# Altium PCB PCB2.PcbDoc
Units mm, origin at the board's own origin, x right, y up, seen from the top; angles counter-clockwise.
Board outline 67.7 x 82.8 mm, 2 copper layers (Top Layer, Bottom Layer); 31 components, 50 nets, 184 pads, 19 vias.
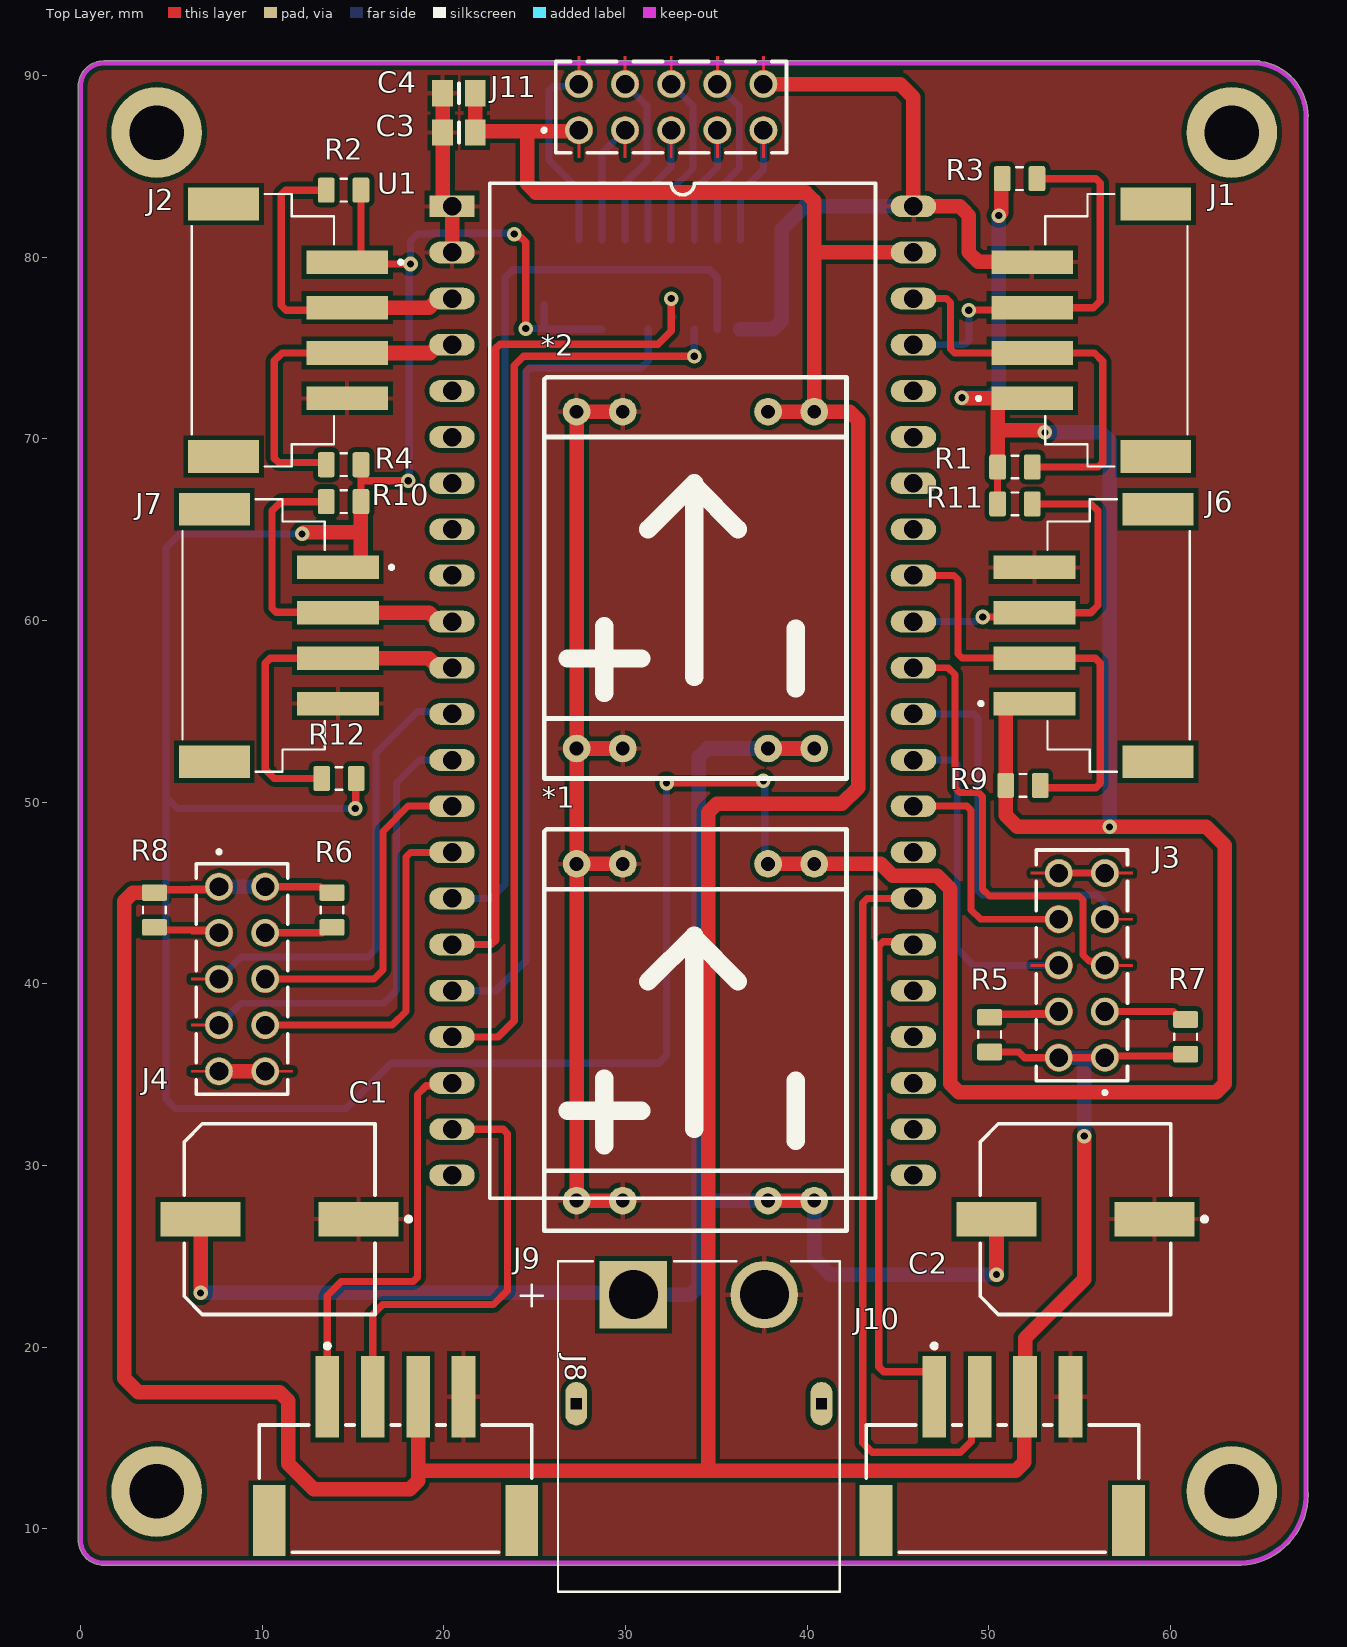
[diagram p0: Top Layer view]
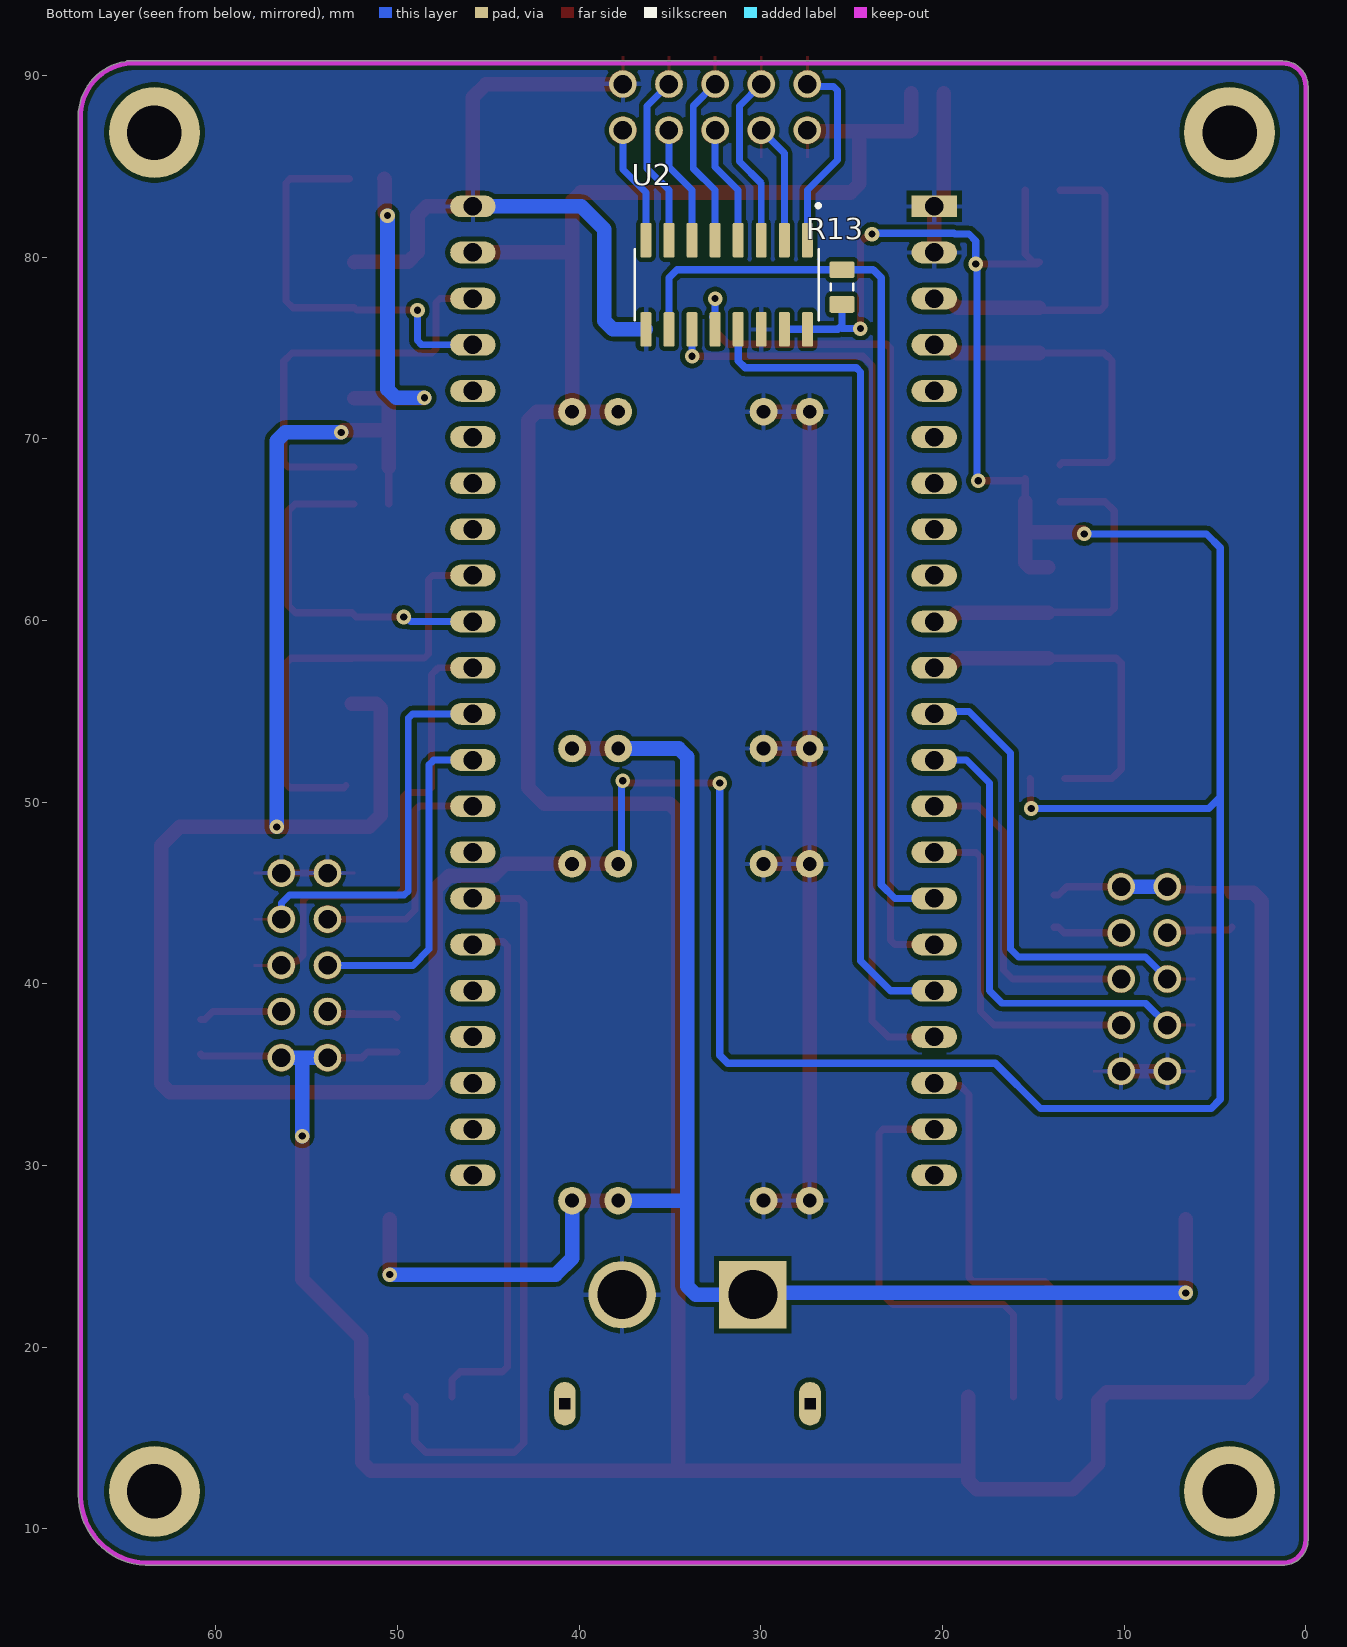
[diagram p1: Bottom Layer view, seen from below]
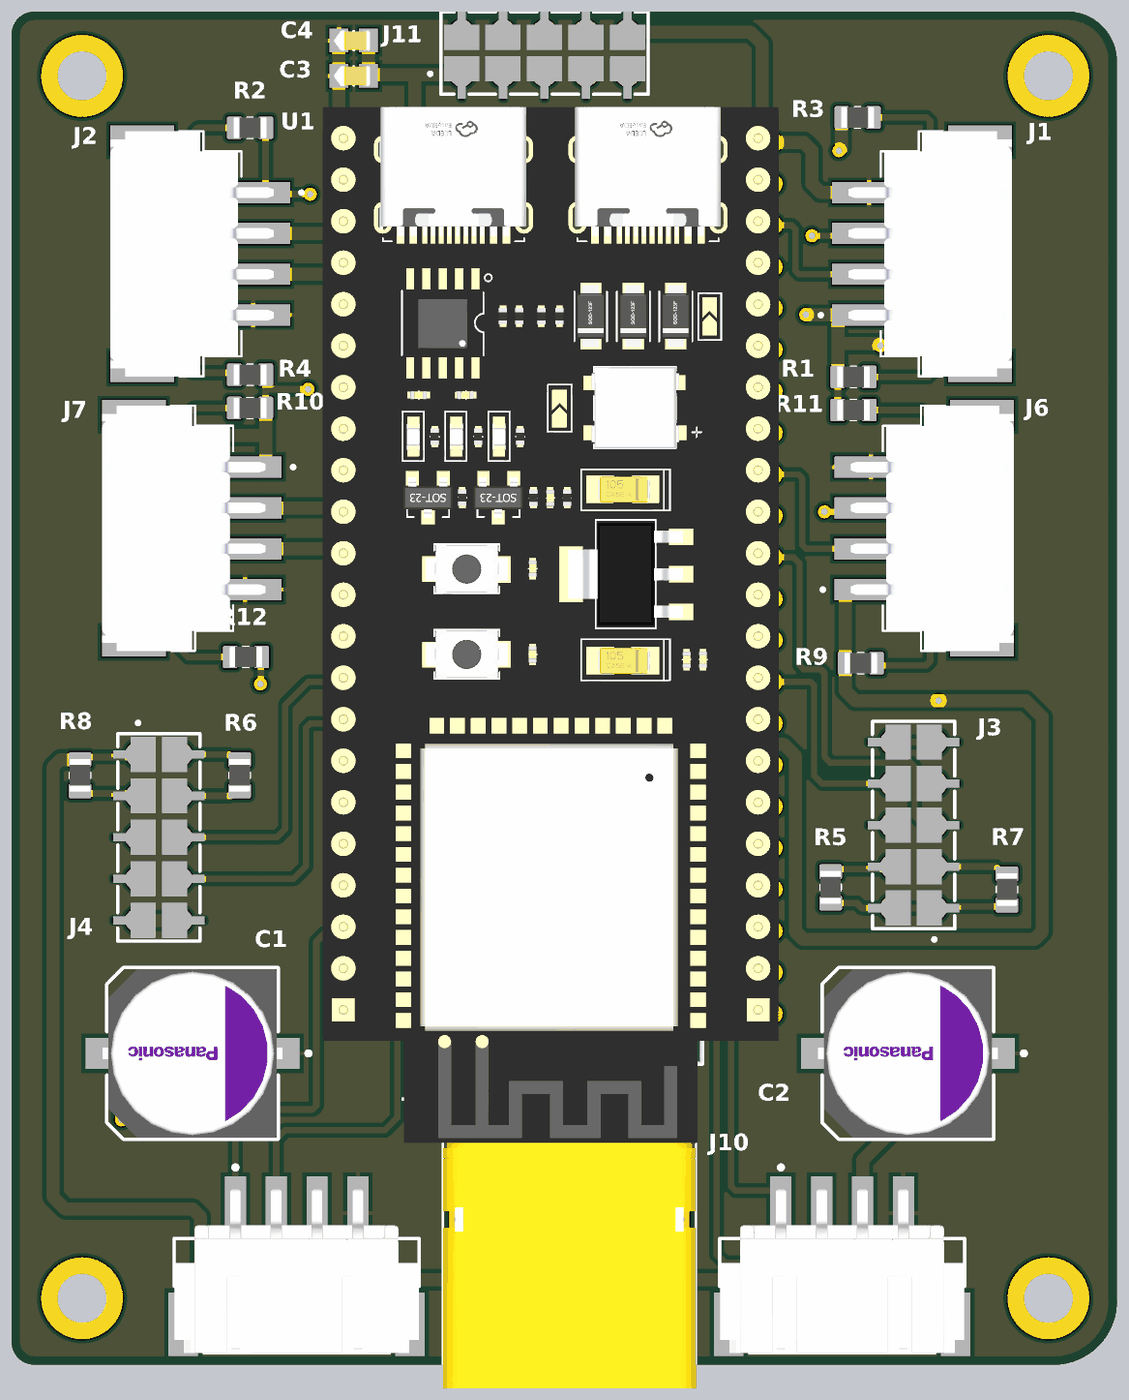
[diagram p2: 3D render of the assembled board from above, using the file's embedded part models]

## Layer stack, top to bottom
Top Solder: solder mask 0.0102, Solder Resist, Dk 3.5
Top Layer: signal copper 0.0356
Dielectric 1: dielectric 0.32, FR-4, Dk 4.8
Bottom Layer: signal copper 0.0356
Bottom Solder: solder mask 0.0102, Solder Resist, Dk 3.5

## Board outline
-0.127,9.398 ccw(c1.27,9.398) 1.269,8.001 1.27,8.001 63.881,8.001 63.887,8.001 ccw(c63.691,11.875) 67.569,11.875 ccw(c63.691,11.875) 67.564,12.069 67.564,87.627 ccw(c64.516,87.757) 67.567,87.757 ccw(c64.516,87.757) 64.983,90.772 64.897,90.805 1.27,90.805 ccw(c1.27,89.408) -0.127,89.408 -0.127,12.573

## Design rules (kind name [scope] priority, off if disabled: settings)
Clearance [All] p1: gap=0.254 ignorepadtopadclearanceinfootprint=FALSE
PolygonConnect [All] p1: connectstyle=Relief reliefconductorwidth=0.254 reliefentries=4 polygonreliefangle="90 Angle" airgapwidth=0.254
RoutingVias [All] p1: holewidth=0.4 width=0.8 viastyle="Through Hole" minholewidth=0.4 minwidth=0.8 maxholewidth=0.4 maxwidth=0.8
SolderMaskExpansion [All] p1: expansion=0.102 istentingtop=FALSE
Width [All] p1: maxlimit=0.8 minlimit=0.2 preferedwidth=0.4
30 further rules are at their usual default settings.

## Components (designator, comment, footprint, x,y, rotation, side; value= is the part's Value field where it differs from the comment)
*1 "MD?" MP1584 40.386,28.069 r90 top
*2 "MD?" MP1584 40.386,52.959 r90 top
C1 "100SXV15MX" FP-OS-CON-SMT-F8-MFG 10.954,27.051 r180 top
C2 "100SXV15MX" FP-OS-CON-SMT-F8-MFG 54.769,27.051 r180 top
C3 "F951C106MPAAQ2" CAPC2012X140N 20.828,86.868 r180 top
C4 "F951C106MPAAQ2" CAPC2012X140N 20.828,89.027 r180 top
J1 "S4B-XH-SM4-TB" JST_S4B-XH-SM4-TB 59.182,75.981 r90 top
J2 "S4B-XH-SM4-TB" JST_S4B-XH-SM4-TB 7.874,75.981 r270 top
J3 "MTLW-105-05-TM-D-150" SAMTEC_MTLW-105-05-TM-D-150 55.118,41.021 r90 top
J4 "MTLW-105-05-TM-D-150" SAMTEC_MTLW-105-05-TM-D-150 8.89,40.271 r270 top
J6 "S4B-XH-SM4-TB" JST_S4B-XH-SM4-TB 59.309,59.182 r90 top
J7 "S4B-XH-SM4-TB" JST_S4B-XH-SM4-TB 7.366,59.182 r270 top
J8 "S4B-XH-SM4-TB(LF)(SN)" FP-S4B-XH-SM4-TB_LF_SN-MFG 17.332,12.222 r0 top
J9 "XT60PW-M" AMASS_XT60PW-M 34.036,16.891 r0 top
J10 "S4B-XH-SM4-TB(LF)(SN)" FP-S4B-XH-SM4-TB_LF_SN-MFG 50.74,12.222 r0 top
J11 "MTLW-105-05-TM-D-150" SAMTEC_MTLW-105-05-TM-D-150 32.512,88.265 r0 top
R1 "RC0805FR-1010KL" RESC2012X60N 51.435,68.453 r180 top
R2 "RC0805FR-1010KL" RESC2012X60N 14.478,83.693 r0 top
R3 "RC0805FR-1010KL" RESC2012X60N 51.689,84.328 r0 top
R4 "RC0805FR-1010KL" RESC2012X60N 14.478,68.58 r180 top
R5 "RC0805FR-1010KL" RESC2012X60N 50.038,37.211 r270 top
R6 "RC0805FR-1010KL" RESC2012X60N 13.843,44.069 r90 top
R7 "RC0805FR-1010KL" RESC2012X60N 60.833,37.084 r270 top
R8 "RC0805FR-1010KL" RESC2012X60N 4.064,44.069 r90 top
R9 "RC0805FR-1010KL" RESC2012X60N 51.877,50.927 r180 top
R10 "RC0805FR-1010KL" RESC2012X60N 14.478,66.548 r0 top
R11 "RC0805FR-1010KL" RESC2012X60N 51.435,66.421 r0 top
R12 "RC0805FR-1010KL" RESC2012X60N 14.224,51.308 r180 top
R13 "RC0805FR-1010KL" RESC2012X60N 25.527,78.359 r270 bottom
U1 "ESP32-S3-N16R8" DIP44 20.447,82.804 r0 top
U2 "MCP3008-I/SL" SOIC127P600X175-16N 31.877,78.486 r270 bottom

## Footprints (in the part's own frame and the unit in brackets; to place one, negate y for a bottom-side part, rotate by r counter-clockwise, add the part's x,y. Pads: shape width x height; smd on the part's side, far side on the other; paste and mask are expansions set on the pad)
AMASS_XT60PW-M [mm]
  rect 3.716x3.716 / inner round 3.716 / far side rect 3.716x3.716 hole 2.7 mask+0.102: 1(-3.6,6)
  round 3.716 hole 2.7 mask+0.102: 2(3.6,6)
  oval 1.2x2.4 hole 0.6 square mask+0.102: SH1(-6.75,0) SH2(6.75,0)
  silkscreen extent -9.8,-10.35 7.75,7.85, body extent -7.75,-10.35 7.75,7.85, height 8.4
CAPC2012X140N [mm]
  rect 1.15x1.45 smd: 1(-0.9,0) 2(0.9,0)
  silkscreen extent 0,-0.55 0,0.55, body extent -1,-0.63 1.2,0.63, height 0.6
DIP44 [mm]
  rect 2.5x1.2 hole 1.02: 1(0,0)
  oval 2.5x1.2 hole 1.02: 2(0,-2.54) 3(0,-5.08) 4(0,-7.62) 5(0,-10.16) 6(0,-12.7) 7(0,-15.24) 8(0,-17.78) 9(0,-20.32) 10(0,-22.86) 11(0,-25.4) 12(0,-27.94) 13(0,-30.48) 14(0,-33.02) 15(0,-35.56) 16(0,-38.1) 17(0,-40.64) 18(0,-43.18) 19(0,-45.72) 20(0,-48.26) 21(0,-50.8) 22(0,-53.34) 23(25.4,0) 24(25.4,-2.54) 25(25.4,-5.08) 26(25.4,-7.62) 27(25.4,-10.16) 28(25.4,-12.7) 29(25.4,-15.24) 30(25.4,-17.78) 31(25.4,-20.32) 32(25.4,-22.86) 33(25.4,-25.4) 34(25.4,-27.94) 35(25.4,-30.48) 36(25.4,-33.02) 37(25.4,-35.56) 38(25.4,-38.1) 39(25.4,-40.64) 40(25.4,-43.18) 41(25.4,-45.72) 42(25.4,-48.26) 43(25.4,-50.8) 44(25.4,-53.34)
  silkscreen extent 2.08,-54.61 23.32,1.27, body extent -1.52,-61.23 26.42,2.16, height 11.25
FP-OS-CON-SMT-F8-MFG [mm]
  rect 4.4x1.9 smd paste+0 mask+0: 1(-4.35,0) 2(4.35,0)
  silkscreen extent -7.23,-5.25 5.25,5.25, body extent -6.8,-5.5 6.8,5.5, height 0.25
FP-S4B-XH-SM4-TB_LF_SN-MFG [mm]
  rect 1.3x4.5 smd paste+0 mask+0: 1(-3.75,5.05) 2(-1.25,5.05) 3(1.25,5.05) 4(3.75,5.05)
  rect 1.8x3.9 smd paste+0 mask+0: 5(-6.95,-1.75) 6(6.95,-1.75)
  silkscreen extent -7.5,-3.5 7.5,7.97, body extent -7.95,-3.8 7.95,7.4, height 0.25
JST_S4B-XH-SM4-TB [mm]
  rect 1.3x4.5 smd: 1(-3.75,6.8) 2(-1.25,6.8) 3(1.25,6.8) 4(3.75,6.8)
  rect 1.8x3.9 smd: SH1(-6.95,0) SH2(6.95,0)
  silkscreen extent -7.5,-1.75 7.5,9.85, body extent -7.5,-1.95 7.5,8.05, height 6.12
MP1584 [mil]
  round 60 hole 30: 1(0,100) 1(0,0) 2(0,514.96) 2(0,414.96) 3(729.92,414.96) 3(729.92,514.96) 4(729.92,0) 4(729.92,100)
  silkscreen extent -65,-70 805,585, body extent -65,-71 805,591, height 161
RESC2012X60N [mm]
  rrect25% 0.92x1.38 smd: 1(-0.955,0) 2(0.955,0)
  silkscreen extent -0.18,-0.62 0.18,0.62, body extent -1,-0.63 1,0.63, height 0.6
SAMTEC_MTLW-105-05-TM-D-150 [mm]
  round 1.52 hole 1.02: 01(-5.08,-1.27) 02(-5.08,1.27) 03(-2.54,-1.27) 04(-2.54,1.27) 05(0,-1.27) 06(0,1.27) 07(2.54,-1.27) 08(2.54,1.27) 09(5.08,-1.27) 10(5.08,1.27)
  Top Layer region: 5.145,2.03 5.174,2.027 5.208,2.022 5.243,2.016 5.277,2.008 5.31,1.998 5.343,1.987 5.376,1.975 5.408,1.961 5.439,1.945 5.47,1.928 5.5,1.91 5.529,1.89 5.556,1.869 5.583,1.847 5.609,1.823 5.634,1.799 5.658,1.773 5.68,1.746 5.701,1.718 5.721,1.69 5.74,1.66 5.757,1.63 5.773,1.598 5.787,1.566 5.8,1.534 5.811,1.501 5.821,1.467 5.829,1.433 5.836,1.399 5.84,1.37 5.84,1.27 5.839,1.23 5.836,1.191 5.831,1.151 5.823,1.112 5.814,1.073 5.803,1.035 5.79,0.998 5.774,0.961 5.757,0.925 5.738,0.89 5.717,0.856 5.695,0.823 5.671,0.792 5.645,0.761 5.617,0.733 5.589,0.705 5.558,0.679 5.527,0.655 5.494,0.633 5.46,0.612 5.425,0.593 5.389,0.576 5.352,0.56 5.315,0.547 5.277,0.536 5.238,0.527 5.199,0.519 5.159,0.514 5.12,0.511 5.08,0.51 5.04,0.511 5.001,0.514 4.961,0.519 4.922,0.527 4.883,0.536 4.845,0.547 4.808,0.56 4.771,0.576 4.735,0.593 4.7,0.612 4.666,0.633 4.633,0.655 4.602,0.679 4.571,0.705 4.543,0.733 4.515,0.761 4.489,0.792 4.465,0.823 4.443,0.856 4.422,0.89 4.403,0.925 4.386,0.961 4.37,0.998 4.357,1.035 4.346,1.073 4.337,1.112 4.329,1.151 4.324,1.191 4.321,1.23 4.32,1.27 4.32,1.37 4.324,1.399 4.331,1.433 4.339,1.467 4.349,1.501 4.36,1.534 4.373,1.566 4.387,1.598 4.403,1.63 4.42,1.66 4.439,1.69 4.459,1.718 4.48,1.746 4.502,1.773 4.526,1.799 4.551,1.823 4.577,1.847 4.604,1.869 4.631,1.89 4.66,1.91 4.69,1.928 4.721,1.945 4.752,1.961 4.784,1.975 4.817,1.987 4.85,1.998 4.883,2.008 4.917,2.016 4.952,2.022 4.986,2.027 5.015,2.03 5.015,2.8 5.145,2.8
  Top Layer region: 5.159,-0.514 5.238,-0.527 5.315,-0.547 5.389,-0.576 5.46,-0.612 5.527,-0.655 5.589,-0.705 5.645,-0.761 5.695,-0.823 5.738,-0.89 5.774,-0.961 5.803,-1.035 5.823,-1.112 5.836,-1.191 5.84,-1.27 5.839,-1.308 5.836,-1.346 5.832,-1.383 5.825,-1.421 5.817,-1.457 5.807,-1.494 5.795,-1.529 5.781,-1.564 5.766,-1.599 5.749,-1.633 5.73,-1.665 5.71,-1.697 5.688,-1.728 5.665,-1.757 5.64,-1.786 5.614,-1.813 5.586,-1.839 5.557,-1.863 5.528,-1.886 5.497,-1.908 5.465,-1.928 5.432,-1.946 5.398,-1.962 5.363,-1.977 5.328,-1.991 5.292,-2.002 5.256,-2.012 5.219,-2.02 5.182,-2.026 5.145,-2.03 5.145,-2.8 5.015,-2.8 5.015,-2.03 4.978,-2.026 4.941,-2.02 4.904,-2.012 4.868,-2.002 4.832,-1.991 4.797,-1.977 4.762,-1.962 4.728,-1.946 4.695,-1.928 4.663,-1.908 4.632,-1.886 4.603,-1.863 4.574,-1.839 4.546,-1.813 4.52,-1.786 4.495,-1.757 4.472,-1.728 4.45,-1.697 4.43,-1.665 4.411,-1.633 4.394,-1.599 4.379,-1.564 4.365,-1.529 4.353,-1.494 4.343,-1.457 4.335,-1.421 4.328,-1.383 4.324,-1.346 4.321,-1.308 4.32,-1.27 4.324,-1.191 4.337,-1.112 4.357,-1.035 4.386,-0.961 4.422,-0.89 4.465,-0.823 4.515,-0.761 4.571,-0.705 4.633,-0.655 4.7,-0.612 4.771,-0.576 4.845,-0.547 4.922,-0.527 5.001,-0.514 5.08,-0.51
  Top Layer region: 2.605,2.03 2.634,2.027 2.668,2.022 2.703,2.016 2.737,2.008 2.77,1.998 2.803,1.987 2.836,1.975 2.868,1.961 2.899,1.945 2.93,1.928 2.96,1.91 2.989,1.89 3.016,1.869 3.043,1.847 3.069,1.823 3.094,1.799 3.118,1.773 3.14,1.746 3.161,1.718 3.181,1.69 3.2,1.66 3.217,1.63 3.233,1.598 3.247,1.566 3.26,1.534 3.271,1.501 3.281,1.467 3.289,1.433 3.296,1.399 3.3,1.37 3.3,1.27 3.299,1.23 3.296,1.191 3.291,1.151 3.283,1.112 3.274,1.073 3.263,1.035 3.25,0.998 3.234,0.961 3.217,0.925 3.198,0.89 3.177,0.856 3.155,0.823 3.131,0.792 3.105,0.761 3.077,0.733 3.049,0.705 3.018,0.679 2.987,0.655 2.954,0.633 2.92,0.612 2.885,0.593 2.849,0.576 2.812,0.56 2.775,0.547 2.737,0.536 2.698,0.527 2.659,0.519 2.619,0.514 2.58,0.511 2.54,0.51 2.5,0.511 2.461,0.514 2.421,0.519 2.382,0.527 2.343,0.536 2.305,0.547 2.268,0.56 2.231,0.576 2.195,0.593 2.16,0.612 2.126,0.633 2.093,0.655 2.062,0.679 2.031,0.705 2.003,0.733 1.975,0.761 1.949,0.792 1.925,0.823 1.903,0.856 1.882,0.89 1.863,0.925 1.846,0.961 1.83,0.998 1.817,1.035 1.806,1.073 1.797,1.112 1.789,1.151 1.784,1.191 1.781,1.23 1.78,1.27 1.78,1.37 1.784,1.399 1.791,1.433 1.799,1.467 1.809,1.501 1.82,1.534 1.833,1.566 1.847,1.598 1.863,1.63 1.88,1.66 1.899,1.69 1.919,1.718 1.94,1.746 1.962,1.773 1.986,1.799 2.011,1.823 2.037,1.847 2.064,1.869 2.091,1.89 2.12,1.91 2.15,1.928 2.181,1.945 2.212,1.961 2.244,1.975 2.277,1.987 2.31,1.998 2.343,2.008 2.377,2.016 2.412,2.022 2.446,2.027 2.475,2.03 2.475,2.8 2.605,2.8
  Top Layer region: 2.619,-0.514 2.698,-0.527 2.775,-0.547 2.849,-0.576 2.92,-0.612 2.987,-0.655 3.049,-0.705 3.105,-0.761 3.155,-0.823 3.198,-0.89 3.234,-0.961 3.263,-1.035 3.283,-1.112 3.296,-1.191 3.3,-1.27 3.299,-1.308 3.296,-1.346 3.292,-1.383 3.285,-1.421 3.277,-1.457 3.267,-1.494 3.255,-1.529 3.241,-1.564 3.226,-1.599 3.209,-1.633 3.19,-1.665 3.17,-1.697 3.148,-1.728 3.125,-1.757 3.1,-1.786 3.074,-1.813 3.046,-1.839 3.017,-1.863 2.988,-1.886 2.957,-1.908 2.925,-1.928 2.892,-1.946 2.858,-1.962 2.823,-1.977 2.788,-1.991 2.752,-2.002 2.716,-2.012 2.679,-2.02 2.642,-2.026 2.605,-2.03 2.605,-2.8 2.475,-2.8 2.475,-2.03 2.438,-2.026 2.401,-2.02 2.364,-2.012 2.328,-2.002 2.292,-1.991 2.257,-1.977 2.222,-1.962 2.188,-1.946 2.155,-1.928 2.123,-1.908 2.092,-1.886 2.063,-1.863 2.034,-1.839 2.006,-1.813 1.98,-1.786 1.955,-1.757 1.932,-1.728 1.91,-1.697 1.89,-1.665 1.871,-1.633 1.854,-1.599 1.839,-1.564 1.825,-1.529 1.813,-1.494 1.803,-1.457 1.795,-1.421 1.788,-1.383 1.784,-1.346 1.781,-1.308 1.78,-1.27 1.784,-1.191 1.797,-1.112 1.817,-1.035 1.846,-0.961 1.882,-0.89 1.925,-0.823 1.975,-0.761 2.031,-0.705 2.093,-0.655 2.16,-0.612 2.231,-0.576 2.305,-0.547 2.382,-0.527 2.461,-0.514 2.54,-0.51
  Top Layer region: 0.065,2.03 0.094,2.027 0.128,2.022 0.163,2.016 0.197,2.008 0.23,1.998 0.263,1.987 0.296,1.975 0.328,1.961 0.359,1.945 0.39,1.928 0.42,1.91 0.449,1.89 0.476,1.869 0.503,1.847 0.529,1.823 0.554,1.799 0.578,1.773 0.6,1.746 0.621,1.718 0.641,1.69 0.66,1.66 0.677,1.63 0.693,1.598 0.707,1.566 0.72,1.534 0.731,1.501 0.741,1.467 0.749,1.433 0.756,1.399 0.76,1.37 0.76,1.27 0.759,1.23 0.756,1.191 0.751,1.151 0.743,1.112 0.734,1.073 0.723,1.035 0.71,0.998 0.694,0.961 0.677,0.925 0.658,0.89 0.637,0.856 0.615,0.823 0.591,0.792 0.565,0.761 0.537,0.733 0.509,0.705 0.478,0.679 0.447,0.655 0.414,0.633 0.38,0.612 0.345,0.593 0.309,0.576 0.272,0.56 0.235,0.547 0.197,0.536 0.158,0.527 0.119,0.519 0.079,0.514 0.04,0.511 0,0.51 -0.04,0.511 -0.079,0.514 -0.119,0.519 -0.158,0.527 -0.197,0.536 -0.235,0.547 -0.272,0.56 -0.309,0.576 -0.345,0.593 -0.38,0.612 -0.414,0.633 -0.447,0.655 -0.478,0.679 -0.509,0.705 -0.537,0.733 -0.565,0.761 -0.591,0.792 -0.615,0.823 -0.637,0.856 -0.658,0.89 -0.677,0.925 -0.694,0.961 -0.71,0.998 -0.723,1.035 -0.734,1.073 -0.743,1.112 -0.751,1.151 -0.756,1.191 -0.759,1.23 -0.76,1.27 -0.76,1.37 -0.756,1.399 -0.749,1.433 -0.741,1.467 -0.731,1.501 -0.72,1.534 -0.707,1.566 -0.693,1.598 -0.677,1.63 -0.66,1.66 -0.641,1.69 -0.621,1.718 -0.6,1.746 -0.578,1.773 -0.554,1.799 -0.529,1.823 -0.503,1.847 -0.476,1.869 -0.449,1.89 -0.42,1.91 -0.39,1.928 -0.359,1.945 -0.328,1.961 -0.296,1.975 -0.263,1.987 -0.23,1.998 -0.197,2.008 -0.163,2.016 -0.128,2.022 -0.094,2.027 -0.065,2.03 -0.065,2.8 0.065,2.8
  Top Layer region: 0.079,-0.514 0.158,-0.527 0.235,-0.547 0.309,-0.576 0.38,-0.612 0.447,-0.655 0.509,-0.705 0.565,-0.761 0.615,-0.823 0.658,-0.89 0.694,-0.961 0.723,-1.035 0.743,-1.112 0.756,-1.191 0.76,-1.27 0.759,-1.308 0.756,-1.346 0.752,-1.383 0.745,-1.421 0.737,-1.457 0.727,-1.494 0.715,-1.529 0.701,-1.564 0.686,-1.599 0.669,-1.633 0.65,-1.665 0.63,-1.697 0.608,-1.728 0.585,-1.757 0.56,-1.786 0.534,-1.813 0.506,-1.839 0.477,-1.863 0.448,-1.886 0.417,-1.908 0.385,-1.928 0.352,-1.946 0.318,-1.962 0.283,-1.977 0.248,-1.991 0.212,-2.002 0.176,-2.012 0.139,-2.02 0.102,-2.026 0.065,-2.03 0.065,-2.8 -0.065,-2.8 -0.065,-2.03 -0.102,-2.026 -0.139,-2.02 -0.176,-2.012 -0.212,-2.002 -0.248,-1.991 -0.283,-1.977 -0.318,-1.962 -0.352,-1.946 -0.385,-1.928 -0.417,-1.908 -0.448,-1.886 -0.477,-1.863 -0.506,-1.839 -0.534,-1.813 -0.56,-1.786 -0.585,-1.757 -0.608,-1.728 -0.63,-1.697 -0.65,-1.665 -0.669,-1.633 -0.686,-1.599 -0.701,-1.564 -0.715,-1.529 -0.727,-1.494 -0.737,-1.457 -0.745,-1.421 -0.752,-1.383 -0.756,-1.346 -0.759,-1.308 -0.76,-1.27 -0.756,-1.191 -0.743,-1.112 -0.723,-1.035 -0.694,-0.961 -0.658,-0.89 -0.615,-0.823 -0.565,-0.761 -0.509,-0.705 -0.447,-0.655 -0.38,-0.612 -0.309,-0.576 -0.235,-0.547 -0.158,-0.527 -0.079,-0.514 0,-0.51
  Top Layer region: -2.475,2.03 -2.446,2.027 -2.412,2.022 -2.377,2.016 -2.343,2.008 -2.31,1.998 -2.277,1.987 -2.244,1.975 -2.212,1.961 -2.181,1.945 -2.15,1.928 -2.12,1.91 -2.091,1.89 -2.064,1.869 -2.037,1.847 -2.011,1.823 -1.986,1.799 -1.962,1.773 -1.94,1.746 -1.919,1.718 -1.899,1.69 -1.88,1.66 -1.863,1.63 -1.847,1.598 -1.833,1.566 -1.82,1.534 -1.809,1.501 -1.799,1.467 -1.791,1.433 -1.784,1.399 -1.78,1.37 -1.78,1.27 -1.781,1.23 -1.784,1.191 -1.789,1.151 -1.797,1.112 -1.806,1.073 -1.817,1.035 -1.83,0.998 -1.846,0.961 -1.863,0.925 -1.882,0.89 -1.903,0.856 -1.925,0.823 -1.949,0.792 -1.975,0.761 -2.003,0.733 -2.031,0.705 -2.062,0.679 -2.093,0.655 -2.126,0.633 -2.16,0.612 -2.195,0.593 -2.231,0.576 -2.268,0.56 -2.305,0.547 -2.343,0.536 -2.382,0.527 -2.421,0.519 -2.461,0.514 -2.5,0.511 -2.54,0.51 -2.58,0.511 -2.619,0.514 -2.659,0.519 -2.698,0.527 -2.737,0.536 -2.775,0.547 -2.812,0.56 -2.849,0.576 -2.885,0.593 -2.92,0.612 -2.954,0.633 -2.987,0.655 -3.018,0.679 -3.049,0.705 -3.077,0.733 -3.105,0.761 -3.131,0.792 -3.155,0.823 -3.177,0.856 -3.198,0.89 -3.217,0.925 -3.234,0.961 -3.25,0.998 -3.263,1.035 -3.274,1.073 -3.283,1.112 -3.291,1.151 -3.296,1.191 -3.299,1.23 -3.3,1.27 -3.3,1.37 -3.296,1.399 -3.289,1.433 -3.281,1.467 -3.271,1.501 -3.26,1.534 -3.247,1.566 -3.233,1.598 -3.217,1.63 -3.2,1.66 -3.181,1.69 -3.161,1.718 -3.14,1.746 -3.118,1.773 -3.094,1.799 -3.069,1.823 -3.043,1.847 -3.016,1.869 -2.989,1.89 -2.96,1.91 -2.93,1.928 -2.899,1.945 -2.868,1.961 -2.836,1.975 -2.803,1.987 -2.77,1.998 -2.737,2.008 -2.703,2.016 -2.668,2.022 -2.634,2.027 -2.605,2.03 -2.605,2.8 -2.475,2.8
  Top Layer region: -2.461,-0.514 -2.382,-0.527 -2.305,-0.547 -2.231,-0.576 -2.16,-0.612 -2.093,-0.655 -2.031,-0.705 -1.975,-0.761 -1.925,-0.823 -1.882,-0.89 -1.846,-0.961 -1.817,-1.035 -1.797,-1.112 -1.784,-1.191 -1.78,-1.27 -1.781,-1.308 -1.784,-1.346 -1.788,-1.383 -1.795,-1.421 -1.803,-1.457 -1.813,-1.494 -1.825,-1.529 -1.839,-1.564 -1.854,-1.599 -1.871,-1.633 -1.89,-1.665 -1.91,-1.697 -1.932,-1.728 -1.955,-1.757 -1.98,-1.786 -2.006,-1.813 -2.034,-1.839 -2.063,-1.863 -2.092,-1.886 -2.123,-1.908 -2.155,-1.928 -2.188,-1.946 -2.222,-1.962 -2.257,-1.977 -2.292,-1.991 -2.328,-2.002 -2.364,-2.012 -2.401,-2.02 -2.438,-2.026 -2.475,-2.03 -2.475,-2.8 -2.605,-2.8 -2.605,-2.03 -2.642,-2.026 -2.679,-2.02 -2.716,-2.012 -2.752,-2.002 -2.788,-1.991 -2.823,-1.977 -2.858,-1.962 -2.892,-1.946 -2.925,-1.928 -2.957,-1.908 -2.988,-1.886 -3.017,-1.863 -3.046,-1.839 -3.074,-1.813 -3.1,-1.786 -3.125,-1.757 -3.148,-1.728 -3.17,-1.697 -3.19,-1.665 -3.209,-1.633 -3.226,-1.599 -3.241,-1.564 -3.255,-1.529 -3.267,-1.494 -3.277,-1.457 -3.285,-1.421 -3.292,-1.383 -3.296,-1.346 -3.299,-1.308 -3.3,-1.27 -3.296,-1.191 -3.283,-1.112 -3.263,-1.035 -3.234,-0.961 -3.198,-0.89 -3.155,-0.823 -3.105,-0.761 -3.049,-0.705 -2.987,-0.655 -2.92,-0.612 -2.849,-0.576 -2.775,-0.547 -2.698,-0.527 -2.619,-0.514 -2.54,-0.51
  Top Layer region: -5.015,2.03 -4.986,2.027 -4.952,2.022 -4.917,2.016 -4.883,2.008 -4.85,1.998 -4.817,1.987 -4.784,1.975 -4.752,1.961 -4.721,1.945 -4.69,1.928 -4.66,1.91 -4.631,1.89 -4.604,1.869 -4.577,1.847 -4.551,1.823 -4.526,1.799 -4.502,1.773 -4.48,1.746 -4.459,1.718 -4.439,1.69 -4.42,1.66 -4.403,1.63 -4.387,1.598 -4.373,1.566 -4.36,1.534 -4.349,1.501 -4.339,1.467 -4.331,1.433 -4.324,1.399 -4.32,1.37 -4.32,1.27 -4.321,1.23 -4.324,1.191 -4.329,1.151 -4.337,1.112 -4.346,1.073 -4.357,1.035 -4.37,0.998 -4.386,0.961 -4.403,0.925 -4.422,0.89 -4.443,0.856 -4.465,0.823 -4.489,0.792 -4.515,0.761 -4.543,0.733 -4.571,0.705 -4.602,0.679 -4.633,0.655 -4.666,0.633 -4.7,0.612 -4.735,0.593 -4.771,0.576 -4.808,0.56 -4.845,0.547 -4.883,0.536 -4.922,0.527 -4.961,0.519 -5.001,0.514 -5.04,0.511 -5.08,0.51 -5.12,0.511 -5.159,0.514 -5.199,0.519 -5.238,0.527 -5.277,0.536 -5.315,0.547 -5.352,0.56 -5.389,0.576 -5.425,0.593 -5.46,0.612 -5.494,0.633 -5.527,0.655 -5.558,0.679 -5.589,0.705 -5.617,0.733 -5.645,0.761 -5.671,0.792 -5.695,0.823 -5.717,0.856 -5.738,0.89 -5.757,0.925 -5.774,0.961 -5.79,0.998 -5.803,1.035 -5.814,1.073 -5.823,1.112 -5.831,1.151 -5.836,1.191 -5.839,1.23 -5.84,1.27 -5.84,1.37 -5.836,1.399 -5.829,1.433 -5.821,1.467 -5.811,1.501 -5.8,1.534 -5.787,1.566 -5.773,1.598 -5.757,1.63 -5.74,1.66 -5.721,1.69 -5.701,1.718 -5.68,1.746 -5.658,1.773 -5.634,1.799 -5.609,1.823 -5.583,1.847 -5.556,1.869 -5.529,1.89 -5.5,1.91 -5.47,1.928 -5.439,1.945 -5.408,1.961 -5.376,1.975 -5.343,1.987 -5.31,1.998 -5.277,2.008 -5.243,2.016 -5.208,2.022 -5.174,2.027 -5.145,2.03 -5.145,2.8 -5.015,2.8
  Top Layer region: -5.001,-0.514 -4.922,-0.527 -4.845,-0.547 -4.771,-0.576 -4.7,-0.612 -4.633,-0.655 -4.571,-0.705 -4.515,-0.761 -4.465,-0.823 -4.422,-0.89 -4.386,-0.961 -4.357,-1.035 -4.337,-1.112 -4.324,-1.191 -4.32,-1.27 -4.321,-1.308 -4.324,-1.346 -4.328,-1.383 -4.335,-1.421 -4.343,-1.457 -4.353,-1.494 -4.365,-1.529 -4.379,-1.564 -4.394,-1.599 -4.411,-1.633 -4.43,-1.665 -4.45,-1.697 -4.472,-1.728 -4.495,-1.757 -4.52,-1.786 -4.546,-1.813 -4.574,-1.839 -4.603,-1.863 -4.632,-1.886 -4.663,-1.908 -4.695,-1.928 -4.728,-1.946 -4.762,-1.962 -4.797,-1.977 -4.832,-1.991 -4.868,-2.002 -4.904,-2.012 -4.941,-2.02 -4.978,-2.026 -5.015,-2.03 -5.015,-2.8 -5.145,-2.8 -5.145,-2.03 -5.182,-2.026 -5.219,-2.02 -5.256,-2.012 -5.292,-2.002 -5.328,-1.991 -5.363,-1.977 -5.398,-1.962 -5.432,-1.946 -5.465,-1.928 -5.497,-1.908 -5.528,-1.886 -5.557,-1.863 -5.586,-1.839 -5.614,-1.813 -5.64,-1.786 -5.665,-1.757 -5.688,-1.728 -5.71,-1.697 -5.73,-1.665 -5.749,-1.633 -5.766,-1.599 -5.781,-1.564 -5.795,-1.529 -5.807,-1.494 -5.817,-1.457 -5.825,-1.421 -5.832,-1.383 -5.836,-1.346 -5.839,-1.308 -5.84,-1.27 -5.836,-1.191 -5.823,-1.112 -5.803,-1.035 -5.774,-0.961 -5.738,-0.89 -5.695,-0.823 -5.645,-0.761 -5.589,-0.705 -5.527,-0.655 -5.46,-0.612 -5.389,-0.576 -5.315,-0.547 -5.238,-0.527 -5.159,-0.514 -5.08,-0.51
  silkscreen extent -7.1,-2.52 6.35,2.52
SOIC127P600X175-16N [mm]
  rrect25% 1.9x0.6 smd: 1(-2.455,4.445) 2(-2.455,3.175) 3(-2.455,1.905) 4(-2.455,0.635) 5(-2.455,-0.635) 6(-2.455,-1.905) 7(-2.455,-3.175) 8(-2.455,-4.445) 9(2.455,-4.445) 10(2.455,-3.175) 11(2.455,-1.905) 12(2.455,-0.635) 13(2.455,0.635) 14(2.455,1.905) 15(2.455,3.175) 16(2.455,4.445)
  silkscreen extent -4.45,-5.07 1.95,5.14, body extent -3,-4.95 3,4.95, height 1.75

## Part data
*1 *2: library part MP1584
C1 C2: library part CMP-05428-000606-1, "Conductive Polymer Aluminum Solid Capacitors (OS-CON) 15uF ±20% 100V RADIAL SMT 10x7.9mm", Capacitance=15uF, Case/Package=Radial, ESR (Equivalent Series Resistance)=60mR, Max Operating Temperature=125°C, Min Operating Temperature=-55°C, Tolerance=20%, Voltage Rating=100V, Life (Hours)=1000Hour, Mount="Surface Mount", Packaging="Cut Tape", Series="OS-CON™, SXV"
C3 C4: "10ÂµF Conformal Coated Tantalum Capacitors 16V 0805 (2012 Metric) 4Ohm", Package="0805 AVX", Check_prices=https://www.snapeda.com/parts/F951C106MPAAQ2/AVX%20/%20Kyocera/view-part/1683022/?ref=eda, Digi-Key_Part_Number=478-8456-1-ND, MF=AVX, MP=F951C106MPAAQ2, SnapEDA_Link=https://www.snapeda.com/parts/F951C106MPAAQ2/AVX%20/%20Kyocera/view-part/1683022/?ref=snap
J1 J2 J6 J7: "Connector Header Surface Mount, Right Angle 4 position 0.098 (2.50mm)", Package=None, Check_prices=https://www.snapeda.com/parts/S4B/XH/SM4/TB/JST/view-part/?ref=eda, MF="JST Sales", MP=S4B/XH/SM4/TB, SnapEDA_Link=https://www.snapeda.com/parts/S4B/XH/SM4/TB/JST/view-part/?ref=snap
J3 J4 J11: Package=None, Availability=Unavailable, MP=MTLW-105-05-TM-D-150, Price=None
J8 J10: library part CMP-17439-000072-1, "CONN HEADER SMD R/A 4POS 2.5MM", Color=Natural, Contact Resistance=20mR, Housing Color=Beige, Max Current Rating=3A, Max Operating Temperature=85°C, Max Voltage Rating (AC)=250V, Min Operating Temperature=-25°C, Package Quantity=1, Connector Type="Male Pin", Contact Material="Copper Alloy", Contact Plating=Tin, Contact Type="Male Pin", Depth=10mm, Gender=Male, Housing Material=Polyamide, Lead Free="Lead Free", Length=15mm, Mount="Surface Mount", Number of Contacts=4, Number of Positions=4, Number of Rows=1, Orientation="Right Angle", Packaging="Tape and Reel", Pitch=0.098inch, REACH SVHC="No SVHC", Series=XH, Termination=Solder
J9: "Socket, DC supply, male, PIN: 2", Package=Package, Check_prices=https://www.snapeda.com/parts/XT60PW-M/AMASS/view-part/?ref=eda, MF=AMASS, MP=XT60PW-M, SnapEDA_Link=https://www.snapeda.com/parts/XT60PW-M/AMASS/view-part/?ref=snap
R1 R2 R3 R4 R5 R6 R7 R8 R9 R10 R11 R12 R13: "RES, THICK FILM, 10K, 1%, 0.125W, 0805;; RES, THICK FILM, 10K, 1%, 0.125W, 0805; Resistance:10kohm; Resistance Tolerance:Â± 1%; Power Rating:125mW; Resistor Case Style:0805 ^2012 Metric]; Resistor Technology:Thick Film; Resistor Type:General Purpose; Prod", Package="0805-2 YAGEO", Check_prices=https://www.snapeda.com/parts/RC0805FR1010KL/Yageo/view-part/?ref=eda, MF="Yageo Corporation", MP=RC0805FR1010KL, SnapEDA_Link=https://www.snapeda.com/parts/RC0805FR1010KL/Yageo/view-part/?ref=snap
U2: "10 Bit Analog to Digital Converter 4, 8 Input 1 SAR 16-SOIC", Package="SOIC-16 Microchip", Availability="In Stock", Check_prices=https://www.snapeda.com/parts/MCP3008-I/SL/Microchip/view-part/?ref=eda, MF=Microchip, MP=MCP3008-I/SL, Price=None, Purchase-URL=https://pricing.snapeda.com/search/part/MCP3008-I/SL/?ref=eda, SnapEDA_Link=https://www.snapeda.com/parts/MCP3008-I/SL/Microchip/view-part/?ref=snap

## Free pads (board coordinates)
  round 5 hole 3: 1(4.191,12.065) 1(4.191,86.868) 1(63.373,12.065) 1(63.373,86.868)

## Via types
v1: diameter 0.8, hole 0.4, Top Layer to Bottom Layer, 19 vias

## Nets (pads, with @x,y where several pads share a name; then routed paths per layer and width w, separated by ;. In a path a pad name is that pad's centre, name@x,y a point inside that pad or via, vN(x,y) a via of type N, cw(c..) or ccw(c..) an arc to the next point about the centre after c; other vN are vias at no path point)
3V3: *1.4 J1.1 J2.1 J6.1 J7.1 R1.2 R2.2 R3.1 R4.1 R9.2 R10.2 R11.1 R12.1 R13.2 U2.15 U2.16 | length 276.5
  Top Layer w0.4: v1(15.113,49.657) 15.146,49.69 15.146,51.275 R12.1 ; R10.2 15.433,67.818 15.559,67.692 v1(18.034,67.691) v1(18.034,67.691) ; R2.2 15.433,80.181 14.983,79.731 J2.1 14.776,79.629 v1(18.161,79.629) ; v1(23.876,81.28) 23.984,81.28 24.184,81.08 24.277,81.08 24.511,80.846 v1(24.511,76.073) ; v1(32.258,51.054) 37.465,51.054 v1(37.592,51.181) ; R11.1 R1.2
  Top Layer w0.8: v1(12.192,64.77) 12.287,64.865 15.433,64.865 ; J7.1 15.183,62.932 15.433,63.182 15.433,64.865 ; R10.2 15.433,64.865 ; *1.4@37.846,46.609 40.386,46.609 44.059,46.609 44.71,45.958 47.156,45.958 47.879,45.235 47.879,34.505 48.348,34.036 62.523,34.036 62.992,34.505 62.992,47.625 61.976,48.641 v1(56.642,48.641) 51.562,48.641 50.922,49.281 R9.2 50.922,55.182 51.172,55.432 J6.1 ; v1(48.514,72.263) 48.546,72.231 J1.1@50.782,72.231 ; R1.2 50.48,70.485 ; v1(50.546,82.296) 50.688,82.438 50.688,84.282 R3.1 ; J1.1 J1.1@50.782,72.231 ; v1(53.086,70.358) 52.959,70.485 50.48,70.485 ; 50.48,70.485 50.48,71.929 J1.1@50.782,72.231
  Bottom Layer w0.4: v1(12.192,64.77) 5.461,64.77 4.699,64.008 4.699,50.292 ; v1(15.113,49.657) 5.334,49.657 4.699,50.292 ; v1(18.034,67.691) 18.098,67.754 18.098,79.566 v1(18.161,79.629) 18.161,80.899 18.542,81.28 19.322,81.28 19.36,81.318 23.838,81.318 v1(23.876,81.28) ; v1(24.511,76.073) 25.527,76.073 R13.2 ; 25.527,76.265 25.761,76.031 U2.16 U2.15 ; v1(32.258,51.054) 32.258,36.068 31.823,35.633 17.091,35.633 14.605,33.147 5.207,33.147 4.699,33.655 4.699,50.292 ; v1(37.592,51.181) 37.669,51.104 37.669,46.786 *1.4@37.846,46.609
  Bottom Layer w0.8: v1(48.514,72.263) 50.077,72.263 50.546,72.732 v1(50.546,82.296) ; v1(53.086,70.358) 56.173,70.358 56.642,69.889 v1(56.642,48.641)
+5: *2.4 C3.1 C4.1 J3.01 J3.02 J4.01 J4.02 J8.3 J10.3 J11.01 R5.2 R6.2 R7.2 R8.2 U1.24 | length 248.9
  Top Layer w0.4: R8.2 4.228,45.187 7.456,45.187 J4.01 ; J4.02 13.159,45.351 13.613,44.897 R6.2@13.843,44.897 ; R5.2 51.642,36.256 51.957,35.941 J3.02 J3.01 56.482,36.035 60.739,36.035 R7.2
  Top Layer w0.8: R8.2 2.882,45.024 2.413,44.555 2.413,18.288 3.175,17.526 10.961,17.526 11.43,17.057 11.43,13.589 12.827,12.192 18.113,12.192 18.582,12.661 18.582,13.208 ; J8.3 18.582,13.208 ; C4.1 21.728,86.995 21.792,86.931 24.58,86.931 ; J11.01 27.368,86.931 24.58,86.931 ; *2.4@37.846,71.499 *2.4@40.386,71.499 ; U1.24 40.513,80.264 40.386,80.137 ; v1(55.245,31.623) 55.245,23.749 51.99,20.494 J10.3 51.943,17.225 51.943,13.677 51.474,13.208 34.544,13.208 ; 18.582,13.208 34.544,13.208 ; 24.58,86.931 24.58,84.035 25.049,83.566 39.917,83.566 40.386,83.097 40.386,80.137 ; 34.544,13.208 34.544,49.442 35.013,49.911 41.91,49.911 42.799,50.8 42.799,71.03 42.33,71.499 *2.4@40.386,71.499 ; *2.4@40.386,71.499 40.386,80.137
  Bottom Layer w0.8: J4.01 J4.02 ; J3.02 55.245,35.941 ; v1(55.245,31.623) 55.245,35.941 ; J3.01 55.245,35.941
+12: *1.1 *2.1 C1.2 C2.2 J9.1 | length 90.6
  Top Layer w0.8: v1(6.604,22.987) C1.2 ; *1.1@37.846,28.069 *1.1@40.386,28.069 ; *2.1@37.846,52.959 *2.1@40.386,52.959 ; v1(50.419,24.003) C2.2
  Bottom Layer w0.8: v1(6.604,22.987) 30.34,22.987 J9.1 33.567,22.891 34.036,23.36 34.036,28.022 34.083,28.069 *1.1@37.846,28.069 ; 34.036,27.793 34.036,52.49 34.505,52.959 *2.1@37.846,52.959 ; *1.1@40.386,28.069 40.386,24.892 41.275,24.003 v1(50.419,24.003)
A1: J11.02 U2.1 | length 10.7
  Bottom Layer w0.381: U2.1 27.432,83.693 25.781,85.344 25.781,89.172 26.004,89.395 27.292,89.395 J11.02
A2: J11.03 U2.2 | length 6.6
  Bottom Layer w0.381: U2.2 28.702,85.725 J11.03
A3: J11.04 U2.3 | length 9.6
  Bottom Layer w0.381: U2.3 29.972,84.074 31.177,85.279 31.177,88.33 J11.04
A4: J11.05 U2.4 | length 6.6
  Bottom Layer w0.381: U2.4 31.242,83.693 32.512,84.963 J11.05
A5: J11.06 U2.5 | length 9.6
  Bottom Layer w0.381: U2.5 32.512,83.693 33.717,84.898 33.717,88.33 J11.06
A6: J11.07 U2.6 | length 6.6
  Bottom Layer w0.381: U2.6 33.782,83.693 35.052,84.963 J11.07
A7: J11.08 U2.7 | length 9.6
  Bottom Layer w0.381: U2.7 35.052,83.693 36.257,84.898 36.257,88.33 J11.08
A8: J11.09 U2.8 | length 6.6
  Bottom Layer w0.381: U2.8 36.322,83.566 37.592,84.836 J11.09
CLK_LINE: U1.18 U2.13 | length 45.9
  Bottom Layer w0.4: U1.18 22.86,39.624 24.511,41.275 24.511,73.68 24.745,73.914 30.861,73.914 31.242,74.295 U2.13
CS_LINE: R13.1 U1.16 U2.10 | length 51.5
  Bottom Layer w0.4: U1.16 22.606,44.704 23.368,45.466 23.368,78.867 23.815,79.314 R13.1 34.605,79.314 35.052,78.867 U2.10
ENA11: J2.2 R2.1 U1.3 | length 18.5
  Top Layer w0.4: R2.1 11.283,83.693 11.049,83.459 11.049,77.343 11.303,77.089 14.532,77.089 J2.2
  Top Layer w0.8: J2.2 19.196,77.231 19.689,77.724 U1.3
ENA12: J7.2 R10.1 U1.10 | length 18.8
  Top Layer w0.4: R10.1 11.049,66.548 10.541,66.04 10.541,60.686 10.775,60.452 14.146,60.452 J7.2
  Top Layer w0.8: J7.2 19.201,60.432 19.689,59.944 U1.10
ENA13: J1.2 R1.1 U1.25 | length 22.9
  Top Layer w0.381: U1.25 47.656,77.724 47.879,77.501 47.879,74.954 48.102,74.731 J1.2
  Top Layer w0.4: J1.2 55.808,74.731 56.261,74.278 56.261,68.687 56.027,68.453 R1.1
ENA14: J6.2 R9.1 U1.31 | length 24.8
  Top Layer w0.381: U1.31 48.068,62.484 48.291,62.261 48.291,58.155 48.514,57.932 J6.2
  Top Layer w0.4: J6.2 55.86,57.932 56.134,57.658 56.134,51.034 55.9,50.8 52.959,50.8 R9.1
ENA22: J2.3 R4.2 U1.4 | length 18.5
  Top Layer w0.4: R4.2 13.396,68.707 10.902,68.707 10.668,68.941 10.668,74.315 10.902,74.549 10.922,74.549 11.104,74.731 J2.3
  Top Layer w0.8: J2.3 19.236,74.731 19.689,75.184 U1.4
ENA23: J7.3 R12.2 U1.11 | length 19.8
  Top Layer w0.4: R12.2 10.668,51.308 10.542,51.434 10.16,51.816 10.16,57.658 10.434,57.932 J7.3
  Top Layer w0.8: J7.3 19.161,57.932 19.689,57.404 U1.11
ENA24: J1.3 R3.2 U1.26 | length 22.4
  Top Layer w0.381: v1(48.895,77.089) 52.24,77.089 J1.3
  Top Layer w0.4: J1.3 52.397,77.216 55.753,77.216 56.134,77.597 56.134,84.094 55.9,84.328 R3.2
  Bottom Layer w0.381: U1.26 48.672,75.184 48.895,75.407 v1(48.895,77.089)
ENA25: J6.3 R11.2 U1.32 | length 19.5
  Top Layer w0.381: v1(49.657,60.198) 52.275,60.198 J6.3
  Top Layer w0.4: R11.2 55.626,66.421 56.007,66.04 56.007,60.833 55.606,60.432 J6.3
  Bottom Layer w0.381: U1.32 49.29,59.944 49.544,60.198 v1(49.657,60.198)
GND: *1.2 *1.3 *2.2 *2.3 C1.1 C2.1 C3.2 C4.2 J1.4 J2.4 J3.09 J3.10 J4.09 J4.10 J6.4 J7.4 J8.4 J9.2 J10.4 J11.10 U1.1 U1.2 U1.23 U2.9 U2.14 | length 106.7
  Top Layer w0.4: J3.10 J3.09
  Top Layer w0.8: J4.09 J4.10 ; C4.2 C3.2 19.928,83.004 20.128,82.804 U1.1 U1.2 ; *1.2@29.846,28.069 27.306,28.069 *1.3@27.306,46.609 ; *1.3@29.846,46.609 *1.3@27.306,46.609 ; *2.2@29.846,52.959 *2.2@27.306,52.959 ; *2.3@29.846,71.499 27.306,71.499 *2.2@27.306,52.959 ; J11.10 45.124,89.535 45.847,88.812 U1.23 48.387,82.804 48.641,82.55 48.895,82.296 48.895,80.264 49.406,79.753 52.36,79.753 J1.4 ; *1.3@27.306,46.609 *2.2@27.306,52.959
  Bottom Layer w0.8: U2.9 38.139,76.031 38.608,76.5 38.608,81.534 39.878,82.804 U1.23
HA1: J4.05 U1.12 | length 25.3
  Bottom Layer w0.381: J4.05 8.825,41.475 15.821,41.475 16.256,41.91 16.256,52.705 18.542,54.991 20.32,54.991 U1.12
HA2: J4.07 U1.13 | length 25.6
  Bottom Layer w0.381: J4.07 8.825,38.935 16.71,38.935 17.399,39.624 17.399,51.054 18.669,52.324 U1.13
HA3: J4.06 U1.14 | length 18.7
  Top Layer w0.381: J4.06 16.141,40.271 16.637,40.767 16.637,48.387 18.034,49.784 U1.14
HA4: J4.08 U1.15 | length 19.2
  Top Layer w0.381: J4.08 17.157,37.731 17.907,38.481 17.907,46.99 18.161,47.244 U1.15
HB1: J3.05 U1.33 | length 25.7
  Top Layer w0.381: U1.33 47.752,57.404 48.133,57.023 48.133,50.8 48.387,50.546 49.434,50.546 49.657,50.323 49.657,45.212 50.038,44.831 54.96,44.831 55.183,44.608 55.183,41.591 55.51,41.264 55.621,41.264 55.864,41.021 J3.05
HB2: J3.07 U1.34 | length 21.3
  Bottom Layer w0.381: U1.34 49.18,54.864 49.403,54.641 49.403,45.12 49.626,44.896 55.942,44.896 56.388,44.45 J3.07
HB3: J3.06 U1.35 | length 18.6
  Bottom Layer w0.381: U1.35 48.006,52.324 48.133,52.197 48.26,52.07 48.26,41.91 49.149,41.021 J3.06
HB4: J3.08 U1.36 | length 13.8
  Top Layer w0.381: U1.36 48.799,49.784 49.022,49.561 49.022,44.069 49.53,43.561 J3.08
MISO: U1.17 U2.12 | length 48.7
  Top Layer w0.4: U1.17 22.626,42.164 22.86,42.398 22.86,74.985 23.094,75.219 31.785,75.219 32.512,75.946 v1(32.512,77.724)
  Bottom Layer w0.4: U2.12 32.512,76.608 32.612,76.708 32.639,76.708 32.512,76.835 v1(32.512,77.724)
MOSI_LINE: U1.19 U2.11 | length 51.5
  Top Layer w0.4: U1.19 22.987,37.084 23.876,37.973 23.876,74.041 24.384,74.549 v1(33.782,74.549)
  Bottom Layer w0.4: v1(33.782,74.549) U2.11
NetJ3_03: J3.03 R7.1 | length 4.6
  Top Layer w0.4: J3.03 60.161,38.481 60.603,38.039 R7.1
NetJ3_04: J3.04 R5.1 | length 3.9
  Top Layer w0.4: R5.1 50.196,38.323 53.69,38.323 J3.04
NetJ4_03: J4.03 R8.1 | length 3.7
  Top Layer w0.4: R8.1 4.216,42.963 7.468,42.963 J4.03
NetJ4_04: J4.04 R6.1 | length 3.8
  Top Layer w0.4: J4.04 13.31,42.811 13.613,43.114 R6.1
PWMA1: U1.5
PWMA2: U1.6
PWMB1: U1.7
PWMB2: U1.8
PWMC1: U1.27
PWMC2: U1.28
PWMD1: U1.29
PWMD2: U1.30
PWML_7960: U1.41
PWMN_7960: U1.40
UART1_RX: J10.1 U1.39 | length 29.5
  Top Layer w0.4: U1.39 45.694,42.317 44.176,42.317 43.942,42.083 43.942,18.923 44.212,18.653 46.54,18.653 46.99,18.203 J10.1
UART1_TX: J10.2 U1.38 | length 41.7
  Top Layer w0.4: U1.38 43.307,44.704 43.053,44.45 43.053,14.732 43.561,14.224 48.435,14.224 49.04,14.829 49.04,16.822 J10.2
UART2_RX: J8.2 U1.21 | length 24.3
  Top Layer w0.4: J8.2 16.082,21.797 16.637,22.352 22.733,22.352 23.495,23.114 23.495,31.77 23.261,32.004 U1.21
UART2_TX: J8.1 U1.20 | length 23.2
  Top Layer w0.4: J8.1 13.582,22.853 14.351,23.622 18.308,23.622 18.542,23.856 18.542,33.909 19.024,34.391 20.294,34.391 U1.20
pads on no net: J1.SH1 J1.SH2 J2.SH1 J2.SH2 J6.SH1 J6.SH2 J7.SH1 J7.SH2 J8.5 J8.6 J9.SH1 J9.SH2 J10.5 J10.6 U1.9 U1.22 U1.37 U1.42 U1.43 U1.44

## Polygon pours and split planes (outlines as drawn)
GND on Top Layer "GND_L01_P000" (solid, pour order 0): 0,89.281 cw(c1.397,89.281) 1.397,90.678 64.897,90.678 cw(c64.897,88.138) 67.437,88.138 67.437,10.668 cw(c64.897,10.668) 64.897,8.128 1.778,8.128 cw(c1.778,9.906) 0,9.906
GND on Bottom Layer "GND_L02_P001" (solid, pour order 1): 0,88.773 cw(c1.905,88.773) 1.905,90.678 64.897,90.678 cw(c64.897,88.138) 67.437,88.138 67.437,10.668 cw(c64.897,10.668) 64.897,8.128 1.651,8.128 cw(c1.651,9.779) 0,9.779

## Keep-outs
Keep-Out Layer:
  lines w0.254: 64.643,90.678 cw(c64.516,87.757) 67.437,87.63 ; 64.897,90.678 48.133,90.678 25.019,90.678 1.651,90.678 1.27,90.678 ccw(c1.27,89.408) 0,89.408 0,12.573 0,9.398 ccw(c1.27,9.398) 1.27,8.128 63.881,8.128 ccw(c63.691,11.875) 67.437,12.065 ; 67.437,11.811 67.437,87.884